# Altium PCB MolsonPCB.PcbDoc (part 2 of 9)
Units mil, origin at the board's own origin, x right, y up, seen from the top; angles counter-clockwise.
Board outline 8000 x 6000 mil, 14 copper layers (TopLayer (1 oz), InternalPlane1 (0.5 oz), InternalPlane2 (0.5 oz), MidLayer1 (0.5 oz), InternalPlane3 (0.5 oz), MidLayer2 (0.5 oz), InternalPlane4 (0.5 oz), InternalPlane5 (0.5 oz), MidLayer3 (0.5 oz), InternalPlane6 (0.5 oz), MidLayer4 (0.5 oz), InternalPlane7 (0.5 oz), InternalPlane8 (0.5 oz), BottomLayer (1 oz)), stack 86.2 mil thick; 657 components, 643 nets, 3094 pads, 1958 vias.
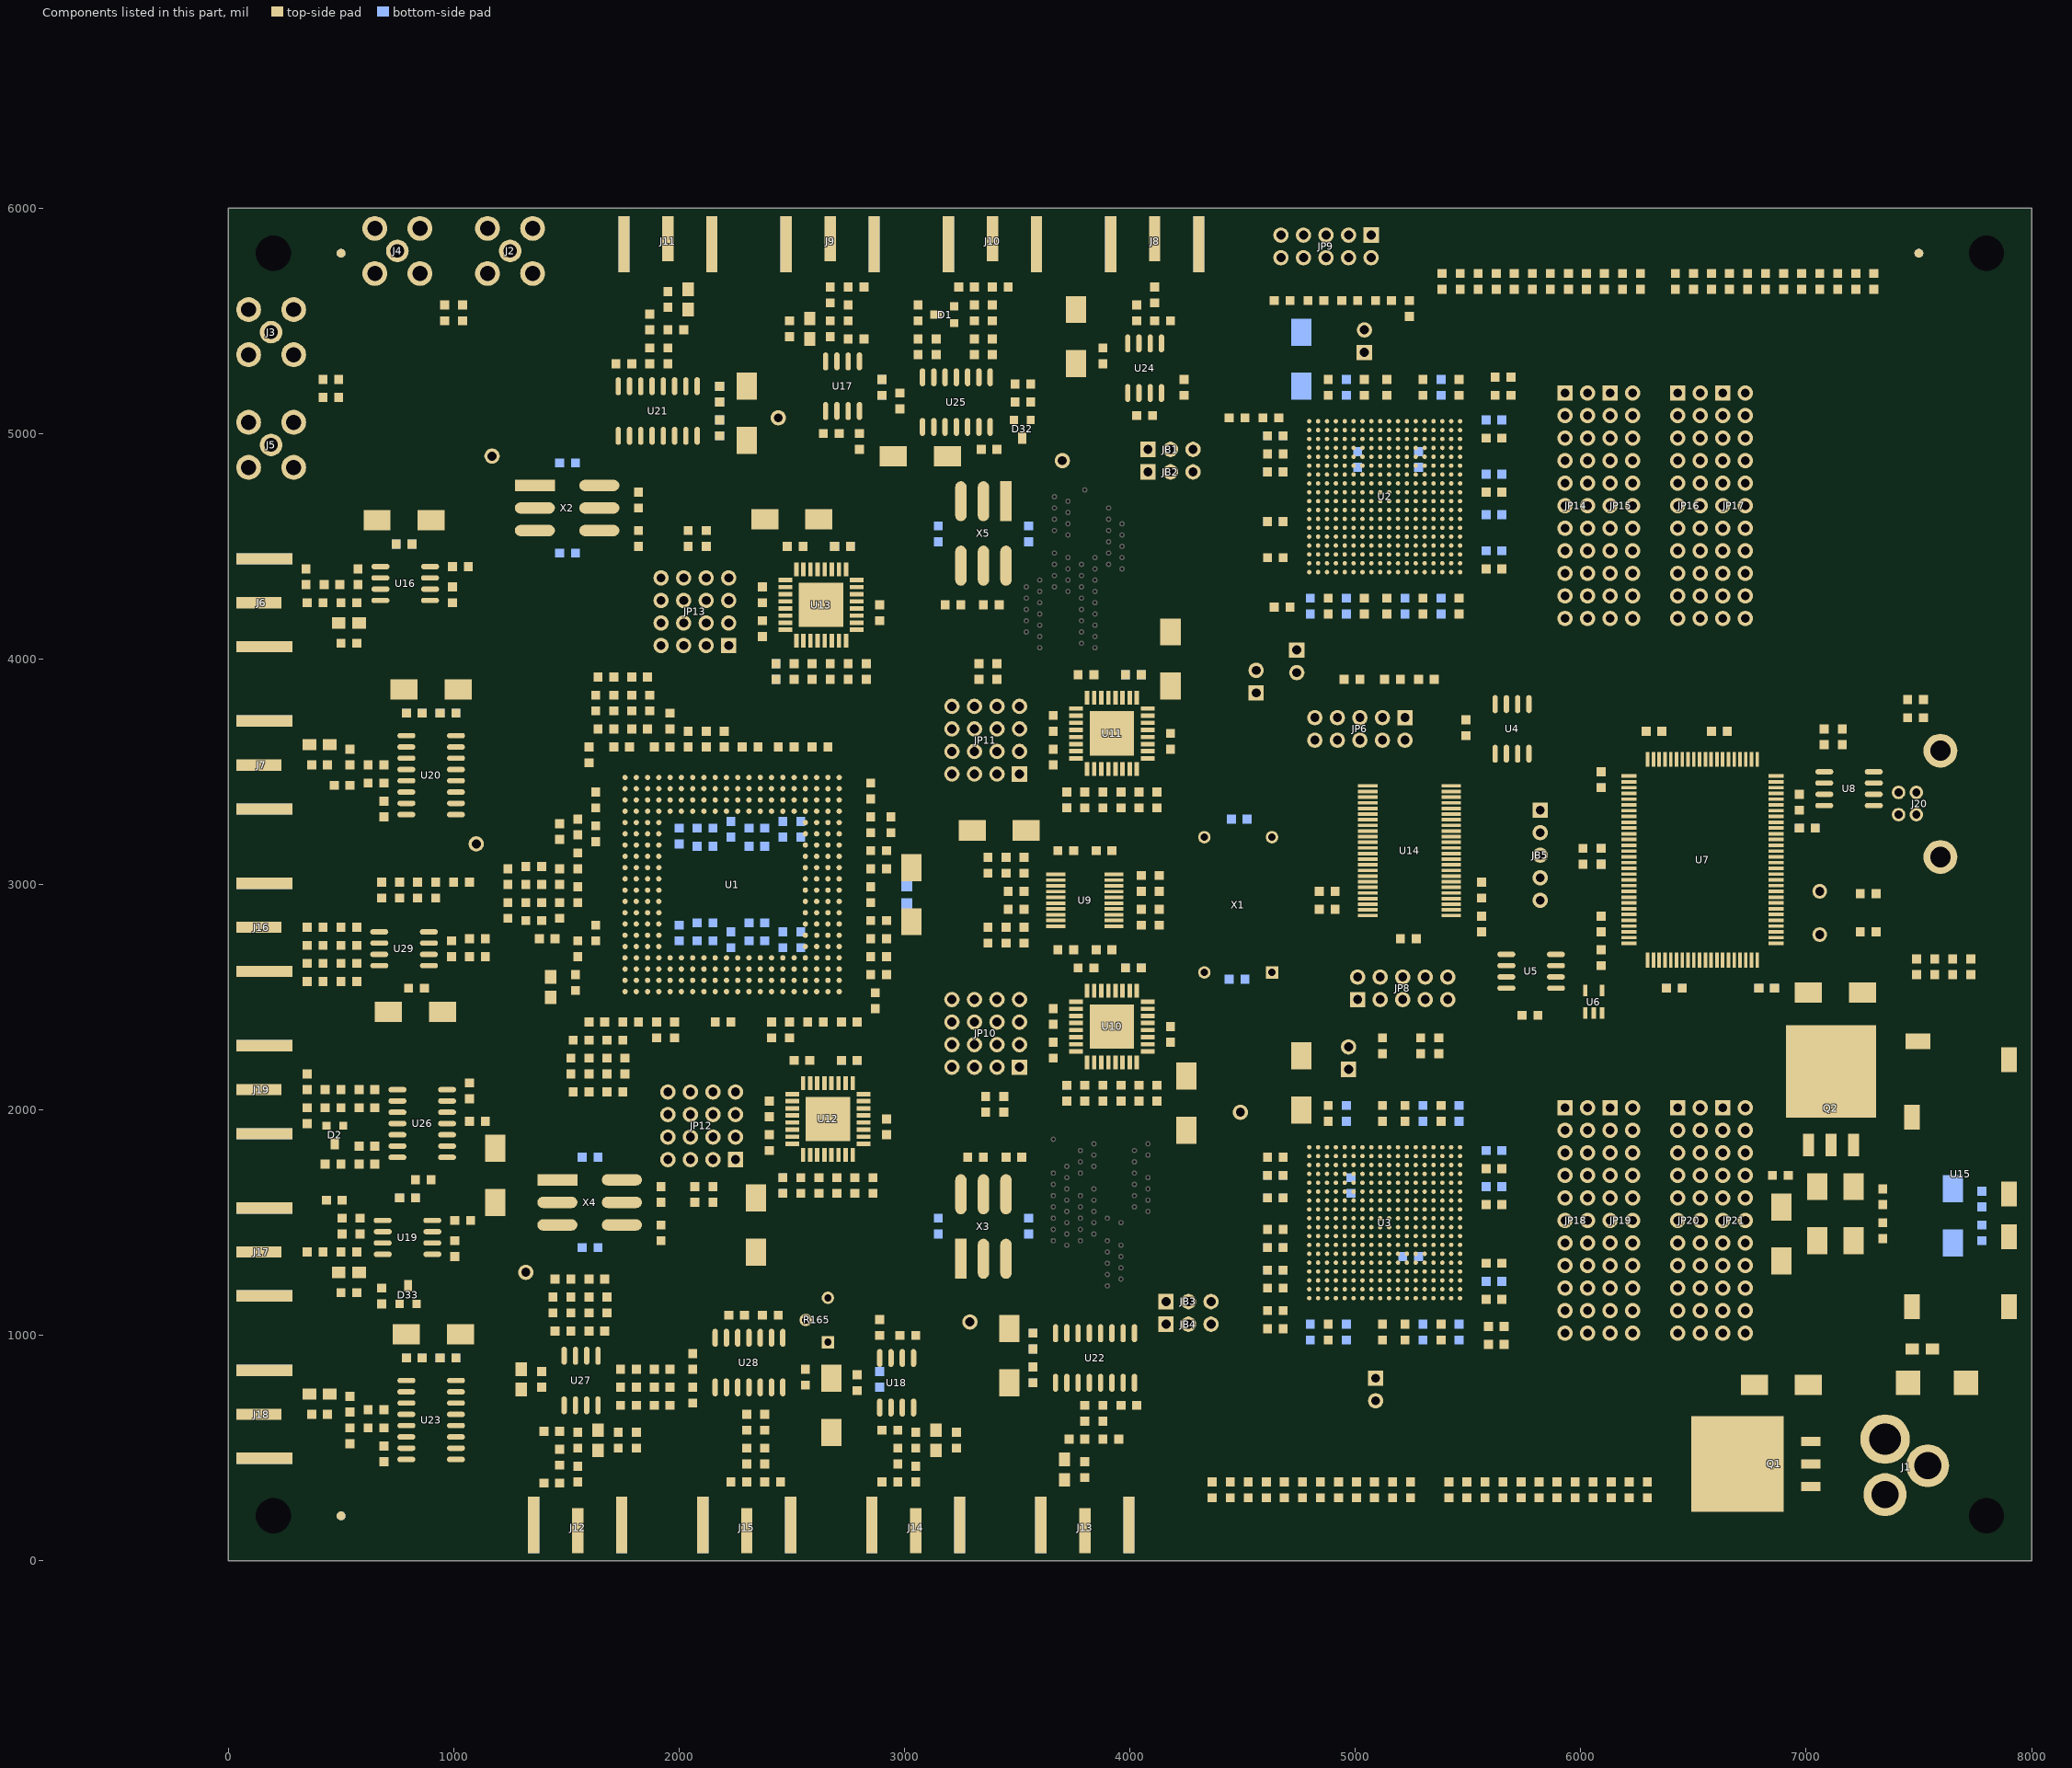
[diagram p14: the components of this part, seen from the top]

## Design rules (kind name [scope] priority, off if disabled: settings) (continued)
Width "Schematic Width Constraint_77" [InNet('NetC112_2')] p87: maxlimit=12.34 minlimit=0 preferedwidth=5.07 toplayer_minwidth=12.34 toplayer_prefwidth=12.34 midlayer1_minwidth=5.07 midlayer1_maxwidth=5.07 midlayer2_minwidth=5.07 midlayer2_maxwidth=5.07 midlayer3_minwidth=5.07 midlayer3_maxwidth=5.07 midlayer4_minwidth=5.07 midlayer4_maxwidth=5.07 bottomlayer_minwidth=12.34 bottomlayer_prefwidth=12.34 impedancedriven=TRUE minimp=50.000000 maximp=50.000000 favimp=50.000000
Width "Schematic Width Constraint_76" [InNet('NetC110_2')] p88: maxlimit=12.34 minlimit=0 preferedwidth=5.07 toplayer_minwidth=12.34 toplayer_prefwidth=12.34 midlayer1_minwidth=5.07 midlayer1_maxwidth=5.07 midlayer2_minwidth=5.07 midlayer2_maxwidth=5.07 midlayer3_minwidth=5.07 midlayer3_maxwidth=5.07 midlayer4_minwidth=5.07 midlayer4_maxwidth=5.07 bottomlayer_minwidth=12.34 bottomlayer_prefwidth=12.34 impedancedriven=TRUE minimp=50.000000 maximp=50.000000 favimp=50.000000
Width "Schematic Width Constraint_75" [InNet('NetC86_2')] p89: maxlimit=5.56 minlimit=0 preferedwidth=1.76 toplayer_minwidth=5.56 toplayer_prefwidth=5.56 midlayer1_minwidth=1.76 midlayer1_maxwidth=1.76 midlayer2_minwidth=1.76 midlayer2_maxwidth=1.76 midlayer3_minwidth=1.76 midlayer3_maxwidth=1.76 midlayer4_minwidth=1.76 midlayer4_maxwidth=1.76 bottomlayer_minwidth=5.56 bottomlayer_prefwidth=5.56 impedancedriven=TRUE minimp=75.000000 maximp=75.000000 favimp=75.000000
Width "Schematic Width Constraint_74" [InNet('NetC86_1')] p90: maxlimit=5.56 minlimit=0 preferedwidth=1.76 toplayer_minwidth=5.56 toplayer_prefwidth=5.56 midlayer1_minwidth=1.76 midlayer1_maxwidth=1.76 midlayer2_minwidth=1.76 midlayer2_maxwidth=1.76 midlayer3_minwidth=1.76 midlayer3_maxwidth=1.76 midlayer4_minwidth=1.76 midlayer4_maxwidth=1.76 bottomlayer_minwidth=5.56 bottomlayer_prefwidth=5.56 impedancedriven=TRUE minimp=75.000000 maximp=75.000000 favimp=75.000000
Width "Schematic Width Constraint_73" [InNet('NetC106_1')] p91: maxlimit=5.56 minlimit=0 preferedwidth=1.76 toplayer_minwidth=5.56 toplayer_prefwidth=5.56 midlayer1_minwidth=1.76 midlayer1_maxwidth=1.76 midlayer2_minwidth=1.76 midlayer2_maxwidth=1.76 midlayer3_minwidth=1.76 midlayer3_maxwidth=1.76 midlayer4_minwidth=1.76 midlayer4_maxwidth=1.76 bottomlayer_minwidth=5.56 bottomlayer_prefwidth=5.56 impedancedriven=TRUE minimp=75.000000 maximp=75.000000 favimp=75.000000
Width "Schematic Width Constraint_72" [InNet('IND2-')] p92: maxlimit=12.34 minlimit=0 preferedwidth=5.07 toplayer_minwidth=12.34 toplayer_prefwidth=12.34 midlayer1_minwidth=5.07 midlayer1_maxwidth=5.07 midlayer2_minwidth=5.07 midlayer2_maxwidth=5.07 midlayer3_minwidth=5.07 midlayer3_maxwidth=5.07 midlayer4_minwidth=5.07 midlayer4_maxwidth=5.07 bottomlayer_minwidth=12.34 bottomlayer_prefwidth=12.34 impedancedriven=TRUE minimp=50.000000 maximp=50.000000 favimp=50.000000
Width "Schematic Width Constraint_71" [InNet('OUTB1+')] p93: maxlimit=12.34 minlimit=0 preferedwidth=5.07 toplayer_minwidth=12.34 toplayer_prefwidth=12.34 midlayer1_minwidth=5.07 midlayer1_maxwidth=5.07 midlayer2_minwidth=5.07 midlayer2_maxwidth=5.07 midlayer3_minwidth=5.07 midlayer3_maxwidth=5.07 midlayer4_minwidth=5.07 midlayer4_maxwidth=5.07 bottomlayer_minwidth=12.34 bottomlayer_prefwidth=12.34 impedancedriven=TRUE minimp=50.000000 maximp=50.000000 favimp=50.000000
Width "Schematic Width Constraint_70" [InNet('NetR120_1')] p94: maxlimit=5.56 minlimit=0 preferedwidth=1.76 toplayer_minwidth=5.56 toplayer_prefwidth=5.56 midlayer1_minwidth=1.76 midlayer1_maxwidth=1.76 midlayer2_minwidth=1.76 midlayer2_maxwidth=1.76 midlayer3_minwidth=1.76 midlayer3_maxwidth=1.76 midlayer4_minwidth=1.76 midlayer4_maxwidth=1.76 bottomlayer_minwidth=5.56 bottomlayer_prefwidth=5.56 impedancedriven=TRUE minimp=75.000000 maximp=75.000000 favimp=75.000000
Width "Schematic Width Constraint_69" [InNet('NetC109_1')] p95: maxlimit=5.56 minlimit=0 preferedwidth=1.76 toplayer_minwidth=5.56 toplayer_prefwidth=5.56 midlayer1_minwidth=1.76 midlayer1_maxwidth=1.76 midlayer2_minwidth=1.76 midlayer2_maxwidth=1.76 midlayer3_minwidth=1.76 midlayer3_maxwidth=1.76 midlayer4_minwidth=1.76 midlayer4_maxwidth=1.76 bottomlayer_minwidth=5.56 bottomlayer_prefwidth=5.56 impedancedriven=TRUE minimp=75.000000 maximp=75.000000 favimp=75.000000
Width "Schematic Width Constraint_68" [InNet('NetC103_2')] p96: maxlimit=5.56 minlimit=0 preferedwidth=1.76 toplayer_minwidth=5.56 toplayer_prefwidth=5.56 midlayer1_minwidth=1.76 midlayer1_maxwidth=1.76 midlayer2_minwidth=1.76 midlayer2_maxwidth=1.76 midlayer3_minwidth=1.76 midlayer3_maxwidth=1.76 midlayer4_minwidth=1.76 midlayer4_maxwidth=1.76 bottomlayer_minwidth=5.56 bottomlayer_prefwidth=5.56 impedancedriven=TRUE minimp=75.000000 maximp=75.000000 favimp=75.000000
Width "Schematic Width Constraint_67" [InNet('NetC104_2')] p97: maxlimit=12.34 minlimit=0 preferedwidth=5.07 toplayer_minwidth=12.34 toplayer_prefwidth=12.34 midlayer1_minwidth=5.07 midlayer1_maxwidth=5.07 midlayer2_minwidth=5.07 midlayer2_maxwidth=5.07 midlayer3_minwidth=5.07 midlayer3_maxwidth=5.07 midlayer4_minwidth=5.07 midlayer4_maxwidth=5.07 bottomlayer_minwidth=12.34 bottomlayer_prefwidth=12.34 impedancedriven=TRUE minimp=50.000000 maximp=50.000000 favimp=50.000000
Width "Schematic Width Constraint_66" [InNet('INB2-')] p98: maxlimit=12.34 minlimit=0 preferedwidth=5.07 toplayer_minwidth=12.34 toplayer_prefwidth=12.34 midlayer1_minwidth=5.07 midlayer1_maxwidth=5.07 midlayer2_minwidth=5.07 midlayer2_maxwidth=5.07 midlayer3_minwidth=5.07 midlayer3_maxwidth=5.07 midlayer4_minwidth=5.07 midlayer4_maxwidth=5.07 bottomlayer_minwidth=12.34 bottomlayer_prefwidth=12.34 impedancedriven=TRUE minimp=50.000000 maximp=50.000000 favimp=50.000000
Width "Schematic Width Constraint_65" [InNet('OUTA2-')] p99: maxlimit=12.34 minlimit=0 preferedwidth=5.07 toplayer_minwidth=12.34 toplayer_prefwidth=12.34 midlayer1_minwidth=5.07 midlayer1_maxwidth=5.07 midlayer2_minwidth=5.07 midlayer2_maxwidth=5.07 midlayer3_minwidth=5.07 midlayer3_maxwidth=5.07 midlayer4_minwidth=5.07 midlayer4_maxwidth=5.07 bottomlayer_minwidth=12.34 bottomlayer_prefwidth=12.34 impedancedriven=TRUE minimp=50.000000 maximp=50.000000 favimp=50.000000
Width "Schematic Width Constraint_64" [InNet('OUTA1-')] p100: maxlimit=12.34 minlimit=0 preferedwidth=5.07 toplayer_minwidth=12.34 toplayer_prefwidth=12.34 midlayer1_minwidth=5.07 midlayer1_maxwidth=5.07 midlayer2_minwidth=5.07 midlayer2_maxwidth=5.07 midlayer3_minwidth=5.07 midlayer3_maxwidth=5.07 midlayer4_minwidth=5.07 midlayer4_maxwidth=5.07 bottomlayer_minwidth=12.34 bottomlayer_prefwidth=12.34 impedancedriven=TRUE minimp=50.000000 maximp=50.000000 favimp=50.000000
Width "Schematic Width Constraint_63" [InNet('OUTB1-')] p101: maxlimit=12.34 minlimit=0 preferedwidth=5.07 toplayer_minwidth=12.34 toplayer_prefwidth=12.34 midlayer1_minwidth=5.07 midlayer1_maxwidth=5.07 midlayer2_minwidth=5.07 midlayer2_maxwidth=5.07 midlayer3_minwidth=5.07 midlayer3_maxwidth=5.07 midlayer4_minwidth=5.07 midlayer4_maxwidth=5.07 bottomlayer_minwidth=12.34 bottomlayer_prefwidth=12.34 impedancedriven=TRUE minimp=50.000000 maximp=50.000000 favimp=50.000000
Width "Schematic Width Constraint_62" [InNet('NetC124_2')] p102: maxlimit=5.56 minlimit=0 preferedwidth=1.76 toplayer_minwidth=5.56 toplayer_prefwidth=5.56 midlayer1_minwidth=1.76 midlayer1_maxwidth=1.76 midlayer2_minwidth=1.76 midlayer2_maxwidth=1.76 midlayer3_minwidth=1.76 midlayer3_maxwidth=1.76 midlayer4_minwidth=1.76 midlayer4_maxwidth=1.76 bottomlayer_minwidth=5.56 bottomlayer_prefwidth=5.56 impedancedriven=TRUE minimp=75.000000 maximp=75.000000 favimp=75.000000
Width "Schematic Width Constraint_61" [InNet('NetC114_2')] p103: maxlimit=5.56 minlimit=0 preferedwidth=1.76 toplayer_minwidth=5.56 toplayer_prefwidth=5.56 midlayer1_minwidth=1.76 midlayer1_maxwidth=1.76 midlayer2_minwidth=1.76 midlayer2_maxwidth=1.76 midlayer3_minwidth=1.76 midlayer3_maxwidth=1.76 midlayer4_minwidth=1.76 midlayer4_maxwidth=1.76 bottomlayer_minwidth=5.56 bottomlayer_prefwidth=5.56 impedancedriven=TRUE minimp=75.000000 maximp=75.000000 favimp=75.000000
Width "Schematic Width Constraint_60" [InNet('NetC115_1')] p104: maxlimit=5.56 minlimit=0 preferedwidth=1.76 toplayer_minwidth=5.56 toplayer_prefwidth=5.56 midlayer1_minwidth=1.76 midlayer1_maxwidth=1.76 midlayer2_minwidth=1.76 midlayer2_maxwidth=1.76 midlayer3_minwidth=1.76 midlayer3_maxwidth=1.76 midlayer4_minwidth=1.76 midlayer4_maxwidth=1.76 bottomlayer_minwidth=5.56 bottomlayer_prefwidth=5.56 impedancedriven=TRUE minimp=75.000000 maximp=75.000000 favimp=75.000000
Width "Schematic Width Constraint_59" [InNet('NetC97_1')] p105: maxlimit=5.56 minlimit=0 preferedwidth=1.76 toplayer_minwidth=5.56 toplayer_prefwidth=5.56 midlayer1_minwidth=1.76 midlayer1_maxwidth=1.76 midlayer2_minwidth=1.76 midlayer2_maxwidth=1.76 midlayer3_minwidth=1.76 midlayer3_maxwidth=1.76 midlayer4_minwidth=1.76 midlayer4_maxwidth=1.76 bottomlayer_minwidth=5.56 bottomlayer_prefwidth=5.56 impedancedriven=TRUE minimp=75.000000 maximp=75.000000 favimp=75.000000
Width "Schematic Width Constraint_58" [InNet('NetC96_2')] p106: maxlimit=5.56 minlimit=0 preferedwidth=1.76 toplayer_minwidth=5.56 toplayer_prefwidth=5.56 midlayer1_minwidth=1.76 midlayer1_maxwidth=1.76 midlayer2_minwidth=1.76 midlayer2_maxwidth=1.76 midlayer3_minwidth=1.76 midlayer3_maxwidth=1.76 midlayer4_minwidth=1.76 midlayer4_maxwidth=1.76 bottomlayer_minwidth=5.56 bottomlayer_prefwidth=5.56 impedancedriven=TRUE minimp=75.000000 maximp=75.000000 favimp=75.000000
Width "Schematic Width Constraint_57" [InNet('NetR69_2')] p107: maxlimit=5.56 minlimit=0 preferedwidth=1.76 toplayer_minwidth=5.56 toplayer_prefwidth=5.56 midlayer1_minwidth=1.76 midlayer1_maxwidth=1.76 midlayer2_minwidth=1.76 midlayer2_maxwidth=1.76 midlayer3_minwidth=1.76 midlayer3_maxwidth=1.76 midlayer4_minwidth=1.76 midlayer4_maxwidth=1.76 bottomlayer_minwidth=5.56 bottomlayer_prefwidth=5.56 impedancedriven=TRUE minimp=75.000000 maximp=75.000000 favimp=75.000000
Width "Schematic Width Constraint_56" [InNet('NetR66_2')] p108: maxlimit=5.56 minlimit=0 preferedwidth=1.76 toplayer_minwidth=5.56 toplayer_prefwidth=5.56 midlayer1_minwidth=1.76 midlayer1_maxwidth=1.76 midlayer2_minwidth=1.76 midlayer2_maxwidth=1.76 midlayer3_minwidth=1.76 midlayer3_maxwidth=1.76 midlayer4_minwidth=1.76 midlayer4_maxwidth=1.76 bottomlayer_minwidth=5.56 bottomlayer_prefwidth=5.56 impedancedriven=TRUE minimp=75.000000 maximp=75.000000 favimp=75.000000
Width "Schematic Width Constraint_55" [InNet('INC2+')] p109: maxlimit=12.34 minlimit=0 preferedwidth=5.07 toplayer_minwidth=12.34 toplayer_prefwidth=12.34 midlayer1_minwidth=5.07 midlayer1_maxwidth=5.07 midlayer2_minwidth=5.07 midlayer2_maxwidth=5.07 midlayer3_minwidth=5.07 midlayer3_maxwidth=5.07 midlayer4_minwidth=5.07 midlayer4_maxwidth=5.07 bottomlayer_minwidth=12.34 bottomlayer_prefwidth=12.34 impedancedriven=TRUE minimp=50.000000 maximp=50.000000 favimp=50.000000
Width "Schematic Width Constraint_54" [InNet('OUTD2+')] p110: maxlimit=12.34 minlimit=0 preferedwidth=5.07 toplayer_minwidth=12.34 toplayer_prefwidth=12.34 midlayer1_minwidth=5.07 midlayer1_maxwidth=5.07 midlayer2_minwidth=5.07 midlayer2_maxwidth=5.07 midlayer3_minwidth=5.07 midlayer3_maxwidth=5.07 midlayer4_minwidth=5.07 midlayer4_maxwidth=5.07 bottomlayer_minwidth=12.34 bottomlayer_prefwidth=12.34 impedancedriven=TRUE minimp=50.000000 maximp=50.000000 favimp=50.000000
Width "Schematic Width Constraint_53" [InNet('REFCLKA+')] p111: maxlimit=12.34 minlimit=0 preferedwidth=5.07 toplayer_minwidth=12.34 toplayer_prefwidth=12.34 midlayer1_minwidth=5.07 midlayer1_maxwidth=5.07 midlayer2_minwidth=5.07 midlayer2_maxwidth=5.07 midlayer3_minwidth=5.07 midlayer3_maxwidth=5.07 midlayer4_minwidth=5.07 midlayer4_maxwidth=5.07 bottomlayer_minwidth=12.34 bottomlayer_prefwidth=12.34 impedancedriven=TRUE minimp=50.000000 maximp=50.000000 favimp=50.000000
Width "Schematic Width Constraint_52" [InNet('NetR35_2')] p112: maxlimit=12.34 minlimit=0 preferedwidth=5.07 toplayer_minwidth=3.18 toplayer_prefwidth=12.34 midlayer1_minwidth=0.75 midlayer1_maxwidth=5.07 midlayer2_minwidth=0.75 midlayer2_maxwidth=5.07 midlayer3_minwidth=0.75 midlayer3_maxwidth=5.07 midlayer4_minwidth=0.75 midlayer4_maxwidth=5.07 bottomlayer_minwidth=3.18 bottomlayer_prefwidth=12.34 impedancedriven=TRUE minimp=50.000000 maximp=90.000000 favimp=50.000000
Width "Schematic Width Constraint_51" [InNet('NetR38_1')] p113: maxlimit=12.34 minlimit=0 preferedwidth=5.07 toplayer_minwidth=3.18 toplayer_prefwidth=12.34 midlayer1_minwidth=0.75 midlayer1_maxwidth=5.07 midlayer2_minwidth=0.75 midlayer2_maxwidth=5.07 midlayer3_minwidth=0.75 midlayer3_maxwidth=5.07 midlayer4_minwidth=0.75 midlayer4_maxwidth=5.07 bottomlayer_minwidth=3.18 bottomlayer_prefwidth=12.34 impedancedriven=TRUE minimp=50.000000 maximp=90.000000 favimp=50.000000
Width "Schematic Width Constraint_50" [InNet('NetJ16_S')] p114: maxlimit=5.56 minlimit=0 preferedwidth=1.76 toplayer_minwidth=5.56 toplayer_prefwidth=5.56 midlayer1_minwidth=1.76 midlayer1_maxwidth=1.76 midlayer2_minwidth=1.76 midlayer2_maxwidth=1.76 midlayer3_minwidth=1.76 midlayer3_maxwidth=1.76 midlayer4_minwidth=1.76 midlayer4_maxwidth=1.76 bottomlayer_minwidth=5.56 bottomlayer_prefwidth=5.56 impedancedriven=TRUE minimp=75.000000 maximp=75.000000 favimp=75.000000
Width "Schematic Width Constraint_49" [InNet('NetC124_1')] p115: maxlimit=5.56 minlimit=0 preferedwidth=1.76 toplayer_minwidth=5.56 toplayer_prefwidth=5.56 midlayer1_minwidth=1.76 midlayer1_maxwidth=1.76 midlayer2_minwidth=1.76 midlayer2_maxwidth=1.76 midlayer3_minwidth=1.76 midlayer3_maxwidth=1.76 midlayer4_minwidth=1.76 midlayer4_maxwidth=1.76 bottomlayer_minwidth=5.56 bottomlayer_prefwidth=5.56 impedancedriven=TRUE minimp=75.000000 maximp=75.000000 favimp=75.000000
Width "Schematic Width Constraint_48" [InNet('NetC121_2')] p116: maxlimit=5.56 minlimit=0 preferedwidth=1.76 toplayer_minwidth=5.56 toplayer_prefwidth=5.56 midlayer1_minwidth=1.76 midlayer1_maxwidth=1.76 midlayer2_minwidth=1.76 midlayer2_maxwidth=1.76 midlayer3_minwidth=1.76 midlayer3_maxwidth=1.76 midlayer4_minwidth=1.76 midlayer4_maxwidth=1.76 bottomlayer_minwidth=5.56 bottomlayer_prefwidth=5.56 impedancedriven=TRUE minimp=75.000000 maximp=75.000000 favimp=75.000000
Width "Schematic Width Constraint_47" [InNet('REFCLKB+')] p117: maxlimit=12.34 minlimit=0 preferedwidth=5.07 toplayer_minwidth=2.05 toplayer_prefwidth=12.34 midlayer1_minwidth=0.3 midlayer1_maxwidth=5.07 midlayer2_minwidth=0.3 midlayer2_maxwidth=5.07 midlayer3_minwidth=0.3 midlayer3_maxwidth=5.07 midlayer4_minwidth=0.3 midlayer4_maxwidth=5.07 bottomlayer_minwidth=2.05 bottomlayer_prefwidth=12.34 impedancedriven=TRUE minimp=50.000000 maximp=100.000000 favimp=50.000000
Width "Schematic Width Constraint_46" [InNet('NetR88_1')] p118: maxlimit=5.56 minlimit=0 preferedwidth=1.76 toplayer_minwidth=5.56 toplayer_prefwidth=5.56 midlayer1_minwidth=1.76 midlayer1_maxwidth=1.76 midlayer2_minwidth=1.76 midlayer2_maxwidth=1.76 midlayer3_minwidth=1.76 midlayer3_maxwidth=1.76 midlayer4_minwidth=1.76 midlayer4_maxwidth=1.76 bottomlayer_minwidth=5.56 bottomlayer_prefwidth=5.56 impedancedriven=TRUE minimp=75.000000 maximp=75.000000 favimp=75.000000
Width "Schematic Width Constraint_45" [InNet('NetL3_1')] p119: maxlimit=5.56 minlimit=0 preferedwidth=1.76 toplayer_minwidth=5.56 toplayer_prefwidth=5.56 midlayer1_minwidth=1.76 midlayer1_maxwidth=1.76 midlayer2_minwidth=1.76 midlayer2_maxwidth=1.76 midlayer3_minwidth=1.76 midlayer3_maxwidth=1.76 midlayer4_minwidth=1.76 midlayer4_maxwidth=1.76 bottomlayer_minwidth=5.56 bottomlayer_prefwidth=5.56 impedancedriven=TRUE minimp=75.000000 maximp=75.000000 favimp=75.000000
Width "Schematic Width Constraint_44" [InNet('NetC96_1')] p120: maxlimit=5.56 minlimit=0 preferedwidth=1.76 toplayer_minwidth=5.56 toplayer_prefwidth=5.56 midlayer1_minwidth=1.76 midlayer1_maxwidth=1.76 midlayer2_minwidth=1.76 midlayer2_maxwidth=1.76 midlayer3_minwidth=1.76 midlayer3_maxwidth=1.76 midlayer4_minwidth=1.76 midlayer4_maxwidth=1.76 bottomlayer_minwidth=5.56 bottomlayer_prefwidth=5.56 impedancedriven=TRUE minimp=75.000000 maximp=75.000000 favimp=75.000000
Width "Schematic Width Constraint_43" [InNet('NetC115_2')] p121: maxlimit=5.56 minlimit=0 preferedwidth=1.76 toplayer_minwidth=5.56 toplayer_prefwidth=5.56 midlayer1_minwidth=1.76 midlayer1_maxwidth=1.76 midlayer2_minwidth=1.76 midlayer2_maxwidth=1.76 midlayer3_minwidth=1.76 midlayer3_maxwidth=1.76 midlayer4_minwidth=1.76 midlayer4_maxwidth=1.76 bottomlayer_minwidth=5.56 bottomlayer_prefwidth=5.56 impedancedriven=TRUE minimp=75.000000 maximp=75.000000 favimp=75.000000
Width "Schematic Width Constraint_42" [InNet('NetC117_2')] p122: maxlimit=5.56 minlimit=0 preferedwidth=1.76 toplayer_minwidth=5.56 toplayer_prefwidth=5.56 midlayer1_minwidth=1.76 midlayer1_maxwidth=1.76 midlayer2_minwidth=1.76 midlayer2_maxwidth=1.76 midlayer3_minwidth=1.76 midlayer3_maxwidth=1.76 midlayer4_minwidth=1.76 midlayer4_maxwidth=1.76 bottomlayer_minwidth=5.56 bottomlayer_prefwidth=5.56 impedancedriven=TRUE minimp=75.000000 maximp=75.000000 favimp=75.000000
Width "Schematic Width Constraint_41" [InNet('NetC78_1')] p123: maxlimit=5.56 minlimit=0 preferedwidth=1.76 toplayer_minwidth=5.56 toplayer_prefwidth=5.56 midlayer1_minwidth=1.76 midlayer1_maxwidth=1.76 midlayer2_minwidth=1.76 midlayer2_maxwidth=1.76 midlayer3_minwidth=1.76 midlayer3_maxwidth=1.76 midlayer4_minwidth=1.76 midlayer4_maxwidth=1.76 bottomlayer_minwidth=5.56 bottomlayer_prefwidth=5.56 impedancedriven=TRUE minimp=75.000000 maximp=75.000000 favimp=75.000000
Width "Schematic Width Constraint_40" [InNet('NetC117_1')] p124: maxlimit=5.56 minlimit=0 preferedwidth=1.76 toplayer_minwidth=5.56 toplayer_prefwidth=5.56 midlayer1_minwidth=1.76 midlayer1_maxwidth=1.76 midlayer2_minwidth=1.76 midlayer2_maxwidth=1.76 midlayer3_minwidth=1.76 midlayer3_maxwidth=1.76 midlayer4_minwidth=1.76 midlayer4_maxwidth=1.76 bottomlayer_minwidth=5.56 bottomlayer_prefwidth=5.56 impedancedriven=TRUE minimp=75.000000 maximp=75.000000 favimp=75.000000
Width "Schematic Width Constraint_39" [InNet('NetC82_2')] p125: maxlimit=5.56 minlimit=0 preferedwidth=1.76 toplayer_minwidth=5.56 toplayer_prefwidth=5.56 midlayer1_minwidth=1.76 midlayer1_maxwidth=1.76 midlayer2_minwidth=1.76 midlayer2_maxwidth=1.76 midlayer3_minwidth=1.76 midlayer3_maxwidth=1.76 midlayer4_minwidth=1.76 midlayer4_maxwidth=1.76 bottomlayer_minwidth=5.56 bottomlayer_prefwidth=5.56 impedancedriven=TRUE minimp=75.000000 maximp=75.000000 favimp=75.000000
Width "Schematic Width Constraint_38" [InNet('NetR77_2')] p126: maxlimit=5.56 minlimit=0 preferedwidth=1.76 toplayer_minwidth=5.56 toplayer_prefwidth=5.56 midlayer1_minwidth=1.76 midlayer1_maxwidth=1.76 midlayer2_minwidth=1.76 midlayer2_maxwidth=1.76 midlayer3_minwidth=1.76 midlayer3_maxwidth=1.76 midlayer4_minwidth=1.76 midlayer4_maxwidth=1.76 bottomlayer_minwidth=5.56 bottomlayer_prefwidth=5.56 impedancedriven=TRUE minimp=75.000000 maximp=75.000000 favimp=75.000000
Width "Schematic Width Constraint_37" [InNet('NetR78_2')] p127: maxlimit=5.56 minlimit=0 preferedwidth=1.76 toplayer_minwidth=5.56 toplayer_prefwidth=5.56 midlayer1_minwidth=1.76 midlayer1_maxwidth=1.76 midlayer2_minwidth=1.76 midlayer2_maxwidth=1.76 midlayer3_minwidth=1.76 midlayer3_maxwidth=1.76 midlayer4_minwidth=1.76 midlayer4_maxwidth=1.76 bottomlayer_minwidth=5.56 bottomlayer_prefwidth=5.56 impedancedriven=TRUE minimp=75.000000 maximp=75.000000 favimp=75.000000
Width "Schematic Width Constraint_36" [InNet('NetJP10_3')] p128: maxlimit=12.34 minlimit=0 preferedwidth=5.07 toplayer_minwidth=2.05 toplayer_prefwidth=12.34 midlayer1_minwidth=0.3 midlayer1_maxwidth=5.07 midlayer2_minwidth=0.3 midlayer2_maxwidth=5.07 midlayer3_minwidth=0.3 midlayer3_maxwidth=5.07 midlayer4_minwidth=0.3 midlayer4_maxwidth=5.07 bottomlayer_minwidth=2.05 bottomlayer_prefwidth=12.34 impedancedriven=TRUE minimp=50.000000 maximp=100.000000 favimp=50.000000
Width "Schematic Width Constraint_35" [InNet('NetR109_1')] p129: maxlimit=5.56 minlimit=0 preferedwidth=1.76 toplayer_minwidth=5.56 toplayer_prefwidth=5.56 midlayer1_minwidth=1.76 midlayer1_maxwidth=1.76 midlayer2_minwidth=1.76 midlayer2_maxwidth=1.76 midlayer3_minwidth=1.76 midlayer3_maxwidth=1.76 midlayer4_minwidth=1.76 midlayer4_maxwidth=1.76 bottomlayer_minwidth=5.56 bottomlayer_prefwidth=5.56 impedancedriven=TRUE minimp=75.000000 maximp=75.000000 favimp=75.000000
Width "Schematic Width Constraint_34" [InNet('NetC105_1')] p130: maxlimit=5.56 minlimit=0 preferedwidth=1.76 toplayer_minwidth=5.56 toplayer_prefwidth=5.56 midlayer1_minwidth=1.76 midlayer1_maxwidth=1.76 midlayer2_minwidth=1.76 midlayer2_maxwidth=1.76 midlayer3_minwidth=1.76 midlayer3_maxwidth=1.76 midlayer4_minwidth=1.76 midlayer4_maxwidth=1.76 bottomlayer_minwidth=5.56 bottomlayer_prefwidth=5.56 impedancedriven=TRUE minimp=75.000000 maximp=75.000000 favimp=75.000000
Width "Schematic Width Constraint_33" [InNet('OUTA1+')] p131: maxlimit=12.34 minlimit=0 preferedwidth=5.07 toplayer_minwidth=12.34 toplayer_prefwidth=12.34 midlayer1_minwidth=5.07 midlayer1_maxwidth=5.07 midlayer2_minwidth=5.07 midlayer2_maxwidth=5.07 midlayer3_minwidth=5.07 midlayer3_maxwidth=5.07 midlayer4_minwidth=5.07 midlayer4_maxwidth=5.07 bottomlayer_minwidth=12.34 bottomlayer_prefwidth=12.34 impedancedriven=TRUE minimp=50.000000 maximp=50.000000 favimp=50.000000
Width "Schematic Width Constraint_32" [InNet('OUTA2+')] p132: maxlimit=12.34 minlimit=0 preferedwidth=5.07 toplayer_minwidth=12.34 toplayer_prefwidth=12.34 midlayer1_minwidth=5.07 midlayer1_maxwidth=5.07 midlayer2_minwidth=5.07 midlayer2_maxwidth=5.07 midlayer3_minwidth=5.07 midlayer3_maxwidth=5.07 midlayer4_minwidth=5.07 midlayer4_maxwidth=5.07 bottomlayer_minwidth=12.34 bottomlayer_prefwidth=12.34 impedancedriven=TRUE minimp=50.000000 maximp=50.000000 favimp=50.000000
Width "Schematic Width Constraint_31" [InNet('INB2+')] p133: maxlimit=12.34 minlimit=0 preferedwidth=5.07 toplayer_minwidth=12.34 toplayer_prefwidth=12.34 midlayer1_minwidth=5.07 midlayer1_maxwidth=5.07 midlayer2_minwidth=5.07 midlayer2_maxwidth=5.07 midlayer3_minwidth=5.07 midlayer3_maxwidth=5.07 midlayer4_minwidth=5.07 midlayer4_maxwidth=5.07 bottomlayer_minwidth=12.34 bottomlayer_prefwidth=12.34 impedancedriven=TRUE minimp=50.000000 maximp=50.000000 favimp=50.000000
Width "Schematic Width Constraint_30" [InNet('NetC97_2')] p134: maxlimit=5.56 minlimit=0 preferedwidth=1.76 toplayer_minwidth=5.56 toplayer_prefwidth=5.56 midlayer1_minwidth=1.76 midlayer1_maxwidth=1.76 midlayer2_minwidth=1.76 midlayer2_maxwidth=1.76 midlayer3_minwidth=1.76 midlayer3_maxwidth=1.76 midlayer4_minwidth=1.76 midlayer4_maxwidth=1.76 bottomlayer_minwidth=5.56 bottomlayer_prefwidth=5.56 impedancedriven=TRUE minimp=75.000000 maximp=75.000000 favimp=75.000000
Width "Schematic Width Constraint_29" [InNet('NetC98_1')] p135: maxlimit=5.56 minlimit=0 preferedwidth=1.76 toplayer_minwidth=5.56 toplayer_prefwidth=5.56 midlayer1_minwidth=1.76 midlayer1_maxwidth=1.76 midlayer2_minwidth=1.76 midlayer2_maxwidth=1.76 midlayer3_minwidth=1.76 midlayer3_maxwidth=1.76 midlayer4_minwidth=1.76 midlayer4_maxwidth=1.76 bottomlayer_minwidth=5.56 bottomlayer_prefwidth=5.56 impedancedriven=TRUE minimp=75.000000 maximp=75.000000 favimp=75.000000
Width "Schematic Width Constraint_28" [InNet('NetC98_2')] p136: maxlimit=5.56 minlimit=0 preferedwidth=1.76 toplayer_minwidth=5.56 toplayer_prefwidth=5.56 midlayer1_minwidth=1.76 midlayer1_maxwidth=1.76 midlayer2_minwidth=1.76 midlayer2_maxwidth=1.76 midlayer3_minwidth=1.76 midlayer3_maxwidth=1.76 midlayer4_minwidth=1.76 midlayer4_maxwidth=1.76 bottomlayer_minwidth=5.56 bottomlayer_prefwidth=5.56 impedancedriven=TRUE minimp=75.000000 maximp=75.000000 favimp=75.000000
Width "Schematic Width Constraint_27" [InNet('INB1+')] p137: maxlimit=12.34 minlimit=0 preferedwidth=5.07 toplayer_minwidth=12.34 toplayer_prefwidth=12.34 midlayer1_minwidth=5.07 midlayer1_maxwidth=5.07 midlayer2_minwidth=5.07 midlayer2_maxwidth=5.07 midlayer3_minwidth=5.07 midlayer3_maxwidth=5.07 midlayer4_minwidth=5.07 midlayer4_maxwidth=5.07 bottomlayer_minwidth=12.34 bottomlayer_prefwidth=12.34 impedancedriven=TRUE minimp=50.000000 maximp=50.000000 favimp=50.000000
Width "Schematic Width Constraint_26" [InNet('NetC69_1')] p138: maxlimit=5.56 minlimit=0 preferedwidth=1.76 toplayer_minwidth=5.56 toplayer_prefwidth=5.56 midlayer1_minwidth=1.76 midlayer1_maxwidth=1.76 midlayer2_minwidth=1.76 midlayer2_maxwidth=1.76 midlayer3_minwidth=1.76 midlayer3_maxwidth=1.76 midlayer4_minwidth=1.76 midlayer4_maxwidth=1.76 bottomlayer_minwidth=5.56 bottomlayer_prefwidth=5.56 impedancedriven=TRUE minimp=75.000000 maximp=75.000000 favimp=75.000000
Width "Schematic Width Constraint_25" [InNet('IND1-')] p139: maxlimit=12.34 minlimit=0 preferedwidth=5.07 toplayer_minwidth=12.34 toplayer_prefwidth=12.34 midlayer1_minwidth=5.07 midlayer1_maxwidth=5.07 midlayer2_minwidth=5.07 midlayer2_maxwidth=5.07 midlayer3_minwidth=5.07 midlayer3_maxwidth=5.07 midlayer4_minwidth=5.07 midlayer4_maxwidth=5.07 bottomlayer_minwidth=12.34 bottomlayer_prefwidth=12.34 impedancedriven=TRUE minimp=50.000000 maximp=50.000000 favimp=50.000000
Width "Schematic Width Constraint_24" [InNet('NetJ18_S')] p140: maxlimit=5.56 minlimit=0 preferedwidth=1.76 toplayer_minwidth=5.56 toplayer_prefwidth=5.56 midlayer1_minwidth=1.76 midlayer1_maxwidth=1.76 midlayer2_minwidth=1.76 midlayer2_maxwidth=1.76 midlayer3_minwidth=1.76 midlayer3_maxwidth=1.76 midlayer4_minwidth=1.76 midlayer4_maxwidth=1.76 bottomlayer_minwidth=5.56 bottomlayer_prefwidth=5.56 impedancedriven=TRUE minimp=75.000000 maximp=75.000000 favimp=75.000000
Width "Schematic Width Constraint_23" [InNet('REFCLKC+')] p141: maxlimit=12.34 minlimit=0 preferedwidth=5.07 toplayer_minwidth=12.34 toplayer_prefwidth=12.34 midlayer1_minwidth=5.07 midlayer1_maxwidth=5.07 midlayer2_minwidth=5.07 midlayer2_maxwidth=5.07 midlayer3_minwidth=5.07 midlayer3_maxwidth=5.07 midlayer4_minwidth=5.07 midlayer4_maxwidth=5.07 bottomlayer_minwidth=12.34 bottomlayer_prefwidth=12.34 impedancedriven=TRUE minimp=50.000000 maximp=50.000000 favimp=50.000000
Width "Schematic Width Constraint_22" [InNet('OUTC1+')] p142: maxlimit=12.34 minlimit=0 preferedwidth=5.07 toplayer_minwidth=12.34 toplayer_prefwidth=12.34 midlayer1_minwidth=5.07 midlayer1_maxwidth=5.07 midlayer2_minwidth=5.07 midlayer2_maxwidth=5.07 midlayer3_minwidth=5.07 midlayer3_maxwidth=5.07 midlayer4_minwidth=5.07 midlayer4_maxwidth=5.07 bottomlayer_minwidth=12.34 bottomlayer_prefwidth=12.34 impedancedriven=TRUE minimp=50.000000 maximp=50.000000 favimp=50.000000
Width "Schematic Width Constraint_21" [InNet('OUTB2+')] p143: maxlimit=12.34 minlimit=0 preferedwidth=5.07 toplayer_minwidth=12.34 toplayer_prefwidth=12.34 midlayer1_minwidth=5.07 midlayer1_maxwidth=5.07 midlayer2_minwidth=5.07 midlayer2_maxwidth=5.07 midlayer3_minwidth=5.07 midlayer3_maxwidth=5.07 midlayer4_minwidth=5.07 midlayer4_maxwidth=5.07 bottomlayer_minwidth=12.34 bottomlayer_prefwidth=12.34 impedancedriven=TRUE minimp=50.000000 maximp=50.000000 favimp=50.000000
Width "Schematic Width Constraint_20" [InNet('NetC93_1')] p144: maxlimit=5.56 minlimit=0 preferedwidth=1.76 toplayer_minwidth=5.56 toplayer_prefwidth=5.56 midlayer1_minwidth=1.76 midlayer1_maxwidth=1.76 midlayer2_minwidth=1.76 midlayer2_maxwidth=1.76 midlayer3_minwidth=1.76 midlayer3_maxwidth=1.76 midlayer4_minwidth=1.76 midlayer4_maxwidth=1.76 bottomlayer_minwidth=5.56 bottomlayer_prefwidth=5.56 impedancedriven=TRUE minimp=75.000000 maximp=75.000000 favimp=75.000000
Width "Schematic Width Constraint_19" [InNet('NetJ15_S')] p145: maxlimit=5.56 minlimit=0 preferedwidth=1.76 toplayer_minwidth=5.56 toplayer_prefwidth=5.56 midlayer1_minwidth=1.76 midlayer1_maxwidth=1.76 midlayer2_minwidth=1.76 midlayer2_maxwidth=1.76 midlayer3_minwidth=1.76 midlayer3_maxwidth=1.76 midlayer4_minwidth=1.76 midlayer4_maxwidth=1.76 bottomlayer_minwidth=5.56 bottomlayer_prefwidth=5.56 impedancedriven=TRUE minimp=75.000000 maximp=75.000000 favimp=75.000000
Width "Schematic Width Constraint_18" [InNet('NetL9_1')] p146: maxlimit=5.56 minlimit=0 preferedwidth=1.76 toplayer_minwidth=5.56 toplayer_prefwidth=5.56 midlayer1_minwidth=1.76 midlayer1_maxwidth=1.76 midlayer2_minwidth=1.76 midlayer2_maxwidth=1.76 midlayer3_minwidth=1.76 midlayer3_maxwidth=1.76 midlayer4_minwidth=1.76 midlayer4_maxwidth=1.76 bottomlayer_minwidth=5.56 bottomlayer_prefwidth=5.56 impedancedriven=TRUE minimp=75.000000 maximp=75.000000 favimp=75.000000
Width "Schematic Width Constraint_17" [InNet('NetL4_1')] p147: maxlimit=5.56 minlimit=0 preferedwidth=1.76 toplayer_minwidth=5.56 toplayer_prefwidth=5.56 midlayer1_minwidth=1.76 midlayer1_maxwidth=1.76 midlayer2_minwidth=1.76 midlayer2_maxwidth=1.76 midlayer3_minwidth=1.76 midlayer3_maxwidth=1.76 midlayer4_minwidth=1.76 midlayer4_maxwidth=1.76 bottomlayer_minwidth=5.56 bottomlayer_prefwidth=5.56 impedancedriven=TRUE minimp=75.000000 maximp=75.000000 favimp=75.000000
Width "Schematic Width Constraint_16" [InNet('NetR80_1')] p148: maxlimit=5.56 minlimit=0 preferedwidth=1.76 toplayer_minwidth=5.56 toplayer_prefwidth=5.56 midlayer1_minwidth=1.76 midlayer1_maxwidth=1.76 midlayer2_minwidth=1.76 midlayer2_maxwidth=1.76 midlayer3_minwidth=1.76 midlayer3_maxwidth=1.76 midlayer4_minwidth=1.76 midlayer4_maxwidth=1.76 bottomlayer_minwidth=5.56 bottomlayer_prefwidth=5.56 impedancedriven=TRUE minimp=75.000000 maximp=75.000000 favimp=75.000000
Width "Schematic Width Constraint_15" [InNet('INC2-')] p149: maxlimit=12.34 minlimit=0 preferedwidth=5.07 toplayer_minwidth=12.34 toplayer_prefwidth=12.34 midlayer1_minwidth=5.07 midlayer1_maxwidth=5.07 midlayer2_minwidth=5.07 midlayer2_maxwidth=5.07 midlayer3_minwidth=5.07 midlayer3_maxwidth=5.07 midlayer4_minwidth=5.07 midlayer4_maxwidth=5.07 bottomlayer_minwidth=12.34 bottomlayer_prefwidth=12.34 impedancedriven=TRUE minimp=50.000000 maximp=50.000000 favimp=50.000000
Width "Schematic Width Constraint_14" [InNet('IND1+')] p150: maxlimit=12.34 minlimit=0 preferedwidth=5.07 toplayer_minwidth=12.34 toplayer_prefwidth=12.34 midlayer1_minwidth=5.07 midlayer1_maxwidth=5.07 midlayer2_minwidth=5.07 midlayer2_maxwidth=5.07 midlayer3_minwidth=5.07 midlayer3_maxwidth=5.07 midlayer4_minwidth=5.07 midlayer4_maxwidth=5.07 bottomlayer_minwidth=12.34 bottomlayer_prefwidth=12.34 impedancedriven=TRUE minimp=50.000000 maximp=50.000000 favimp=50.000000
Width "Schematic Width Constraint_13" [InNet('INB1-')] p151: maxlimit=12.34 minlimit=0 preferedwidth=5.07 toplayer_minwidth=12.34 toplayer_prefwidth=12.34 midlayer1_minwidth=5.07 midlayer1_maxwidth=5.07 midlayer2_minwidth=5.07 midlayer2_maxwidth=5.07 midlayer3_minwidth=5.07 midlayer3_maxwidth=5.07 midlayer4_minwidth=5.07 midlayer4_maxwidth=5.07 bottomlayer_minwidth=12.34 bottomlayer_prefwidth=12.34 impedancedriven=TRUE minimp=50.000000 maximp=50.000000 favimp=50.000000
Width "Schematic Width Constraint_12" [InNet('NetR34_2')] p152: maxlimit=12.34 minlimit=0 preferedwidth=5.07 toplayer_minwidth=3.18 toplayer_prefwidth=12.34 midlayer1_minwidth=0.75 midlayer1_maxwidth=5.07 midlayer2_minwidth=0.75 midlayer2_maxwidth=5.07 midlayer3_minwidth=0.75 midlayer3_maxwidth=5.07 midlayer4_minwidth=0.75 midlayer4_maxwidth=5.07 bottomlayer_minwidth=3.18 bottomlayer_prefwidth=12.34 impedancedriven=TRUE minimp=50.000000 maximp=90.000000 favimp=50.000000
Width "Schematic Width Constraint_11" [InNet('NetR31_2')] p153: maxlimit=12.34 minlimit=0 preferedwidth=5.07 toplayer_minwidth=3.18 toplayer_prefwidth=12.34 midlayer1_minwidth=0.75 midlayer1_maxwidth=5.07 midlayer2_minwidth=0.75 midlayer2_maxwidth=5.07 midlayer3_minwidth=0.75 midlayer3_maxwidth=5.07 midlayer4_minwidth=0.75 midlayer4_maxwidth=5.07 bottomlayer_minwidth=3.18 bottomlayer_prefwidth=12.34 impedancedriven=TRUE minimp=50.000000 maximp=90.000000 favimp=50.000000
Width "Schematic Width Constraint_10" [InNet('OUTB2-')] p154: maxlimit=12.34 minlimit=0 preferedwidth=5.07 toplayer_minwidth=12.34 toplayer_prefwidth=12.34 midlayer1_minwidth=5.07 midlayer1_maxwidth=5.07 midlayer2_minwidth=5.07 midlayer2_maxwidth=5.07 midlayer3_minwidth=5.07 midlayer3_maxwidth=5.07 midlayer4_minwidth=5.07 midlayer4_maxwidth=5.07 bottomlayer_minwidth=12.34 bottomlayer_prefwidth=12.34 impedancedriven=TRUE minimp=50.000000 maximp=50.000000 favimp=50.000000
Width "Schematic Width Constraint_9" [InNet('NetC114_1')] p155: maxlimit=5.56 minlimit=0 preferedwidth=1.76 toplayer_minwidth=5.56 toplayer_prefwidth=5.56 midlayer1_minwidth=1.76 midlayer1_maxwidth=1.76 midlayer2_minwidth=1.76 midlayer2_maxwidth=1.76 midlayer3_minwidth=1.76 midlayer3_maxwidth=1.76 midlayer4_minwidth=1.76 midlayer4_maxwidth=1.76 bottomlayer_minwidth=5.56 bottomlayer_prefwidth=5.56 impedancedriven=TRUE minimp=75.000000 maximp=75.000000 favimp=75.000000
Width "Schematic Width Constraint_8" [InNet('NetC111_1')] p156: maxlimit=5.56 minlimit=0 preferedwidth=1.76 toplayer_minwidth=5.56 toplayer_prefwidth=5.56 midlayer1_minwidth=1.76 midlayer1_maxwidth=1.76 midlayer2_minwidth=1.76 midlayer2_maxwidth=1.76 midlayer3_minwidth=1.76 midlayer3_maxwidth=1.76 midlayer4_minwidth=1.76 midlayer4_maxwidth=1.76 bottomlayer_minwidth=5.56 bottomlayer_prefwidth=5.56 impedancedriven=TRUE minimp=75.000000 maximp=75.000000 favimp=75.000000
Width "Schematic Width Constraint_7" [InNet('NetC82_1')] p157: maxlimit=5.56 minlimit=0 preferedwidth=1.76 toplayer_minwidth=5.56 toplayer_prefwidth=5.56 midlayer1_minwidth=1.76 midlayer1_maxwidth=1.76 midlayer2_minwidth=1.76 midlayer2_maxwidth=1.76 midlayer3_minwidth=1.76 midlayer3_maxwidth=1.76 midlayer4_minwidth=1.76 midlayer4_maxwidth=1.76 bottomlayer_minwidth=5.56 bottomlayer_prefwidth=5.56 impedancedriven=TRUE minimp=75.000000 maximp=75.000000 favimp=75.000000
Width "Schematic Width Constraint_6" [InNet('NetJP13_5')] p158: maxlimit=12.34 minlimit=0 preferedwidth=5.07 toplayer_minwidth=2.05 toplayer_prefwidth=12.34 midlayer1_minwidth=0.3 midlayer1_maxwidth=5.07 midlayer2_minwidth=0.3 midlayer2_maxwidth=5.07 midlayer3_minwidth=0.3 midlayer3_maxwidth=5.07 midlayer4_minwidth=0.3 midlayer4_maxwidth=5.07 bottomlayer_minwidth=2.05 bottomlayer_prefwidth=12.34 impedancedriven=TRUE minimp=50.000000 maximp=100.000000 favimp=50.000000
Width "Schematic Width Constraint_5" [InNet('NetL2_1')] p159: maxlimit=5.56 minlimit=0 preferedwidth=1.76 toplayer_minwidth=5.56 toplayer_prefwidth=5.56 midlayer1_minwidth=1.76 midlayer1_maxwidth=1.76 midlayer2_minwidth=1.76 midlayer2_maxwidth=1.76 midlayer3_minwidth=1.76 midlayer3_maxwidth=1.76 midlayer4_minwidth=1.76 midlayer4_maxwidth=1.76 bottomlayer_minwidth=5.56 bottomlayer_prefwidth=5.56 impedancedriven=TRUE minimp=75.000000 maximp=75.000000 favimp=75.000000
Width "Schematic Width Constraint_4" [InNet('NetC82_2')] p160: maxlimit=5.56 minlimit=0 preferedwidth=1.76 toplayer_minwidth=5.56 toplayer_prefwidth=5.56 midlayer1_minwidth=1.76 midlayer1_maxwidth=1.76 midlayer2_minwidth=1.76 midlayer2_maxwidth=1.76 midlayer3_minwidth=1.76 midlayer3_maxwidth=1.76 midlayer4_minwidth=1.76 midlayer4_maxwidth=1.76 bottomlayer_minwidth=5.56 bottomlayer_prefwidth=5.56 impedancedriven=TRUE minimp=75.000000 maximp=75.000000 favimp=75.000000
Width "Schematic Width Constraint_3" [InNet('OUTD2-')] p161: maxlimit=12.34 minlimit=0 preferedwidth=5.07 toplayer_minwidth=12.34 toplayer_prefwidth=12.34 midlayer1_minwidth=5.07 midlayer1_maxwidth=5.07 midlayer2_minwidth=5.07 midlayer2_maxwidth=5.07 midlayer3_minwidth=5.07 midlayer3_maxwidth=5.07 midlayer4_minwidth=5.07 midlayer4_maxwidth=5.07 bottomlayer_minwidth=12.34 bottomlayer_prefwidth=12.34 impedancedriven=TRUE minimp=50.000000 maximp=50.000000 favimp=50.000000
Width "Schematic Width Constraint_2" [InNet('OUTD1-')] p162: maxlimit=12.34 minlimit=0 preferedwidth=5.07 toplayer_minwidth=12.34 toplayer_prefwidth=12.34 midlayer1_minwidth=5.07 midlayer1_maxwidth=5.07 midlayer2_minwidth=5.07 midlayer2_maxwidth=5.07 midlayer3_minwidth=5.07 midlayer3_maxwidth=5.07 midlayer4_minwidth=5.07 midlayer4_maxwidth=5.07 bottomlayer_minwidth=12.34 bottomlayer_prefwidth=12.34 impedancedriven=TRUE minimp=50.000000 maximp=50.000000 favimp=50.000000
Width "Schematic Width Constraint_1" [InNet('NetC72_1')] p163: maxlimit=5.56 minlimit=0 preferedwidth=1.76 toplayer_minwidth=5.56 toplayer_prefwidth=5.56 midlayer1_minwidth=1.76 midlayer1_maxwidth=1.76 midlayer2_minwidth=1.76 midlayer2_maxwidth=1.76 midlayer3_minwidth=1.76 midlayer3_maxwidth=1.76 midlayer4_minwidth=1.76 midlayer4_maxwidth=1.76 bottomlayer_minwidth=5.56 bottomlayer_prefwidth=5.56 impedancedriven=TRUE minimp=75.000000 maximp=75.000000 favimp=75.000000
Width "Schematic Width Constraint" [InNet('NetR131_1')] p164: maxlimit=5.56 minlimit=0 preferedwidth=1.76 toplayer_minwidth=5.56 toplayer_prefwidth=5.56 midlayer1_minwidth=1.76 midlayer1_maxwidth=1.76 midlayer2_minwidth=1.76 midlayer2_maxwidth=1.76 midlayer3_minwidth=1.76 midlayer3_maxwidth=1.76 midlayer4_minwidth=1.76 midlayer4_maxwidth=1.76 bottomlayer_minwidth=5.56 bottomlayer_prefwidth=5.56 impedancedriven=TRUE minimp=75.000000 maximp=75.000000 favimp=75.000000
Width Width_Power [InNetClass('Power')] p165: maxlimit=100 minlimit=5 preferedwidth=20 toplayer_prefwidth=12 bottomlayer_prefwidth=12 minimp=50.000000 maximp=50.000000 favimp=50.000000
Width [All] p166: maxlimit=100 minlimit=5 preferedwidth=5
12 further rules are at their usual default settings.

## Classes and differential pairs
net class REFCLKD: REFCLKD+ REFCLKD-
net class INC2AC: NetC102_2 NetC104_2
net class OUTC2AC: NetC90_2 NetC92_2
net class OUTD2AC: NetC110_2 NetC112_2
net class IND2: IND2+ IND2-
net class IND1: IND1+ IND1-
net class INC2: INC2+ INC2-
net class INC1: INC1+ INC1-
net class INB2: INB2+ INB2-
net class INB1: INB1+ INB1-
net class INA2: INA2+ INA2-
net class INA1: INA1+ INA1-
net class OUTA2: OUTA2+ OUTA2-
net class OUTA1: OUTA1+ OUTA1-
net class OUTB2: OUTB2+ OUTB2-
net class OUTB1: OUTB1+ OUTB1-
net class OUTC2: OUTC2+ OUTC2-
net class OUTC1: OUTC1+ OUTC1-
net class OUTD1: OUTD1+ OUTD1-
net class OUTD2: OUTD2+ OUTD2-
net class Power: +1.5V +1.5VA +3.3V +5V GND
component class "Serial IO Interface1": C69 C72 C73 C74 C78 C82 C85 C86 C96 C97 C98 C101 C114 C115 C117 C120 C126 C127 C128 C129 C130 C131 C132 C133 C134 C135 C136 C137 C199 C200 C201 C202 C203 C204 C205 C206 C207 C208 C209 C210 C266 C267 C268 C269 C270 C271 C272 C273 C274 C275 C276 C277 J6 J7 J9 J11 J13 J14 J17 J18 L1 L2 L3 L4 L5 L6 L7 L8 R59 R62 R63 R67 R68 R70 R71 R74 R76 R79 R80 R81 R82 R83 R87 R88 R89 R90 R92 R95 R96 R97 R98 R101 R108 R109 R110 R111 R113 R114 R115 R116 R118 R119 R121 R125 R130 R133 R134 R136 U16 U17 U18 U19 U20 U21 U22 U23
net class CTL[2..0]: CTL0 CTL1 CTL2
net class FD[15..0]: FD0 FD1 FD2 FD3 FD4 FD5 FD6 FD7 FD8 FD9 FD10 FD11 FD12 FD13 FD14 FD15
net class PRXDA[9..0]: PRXDA0 PRXDA1 PRXDA2 PRXDA3 PRXDA4 PRXDA5 PRXDA6 PRXDA7 PRXDA8 PRXDA9
net class PRXDB[9..0]: PRXDB0 PRXDB1 PRXDB2 PRXDB3 PRXDB4 PRXDB5 PRXDB6 PRXDB7 PRXDB8 PRXDB9
net class PRXDC[9..0]: PRXDC0 PRXDC1 PRXDC2 PRXDC3 PRXDC4 PRXDC5 PRXDC6 PRXDC7 PRXDC8 PRXDC9
net class PRXDD[9..0]: PRXDD0 PRXDD1 PRXDD2 PRXDD3 PRXDD4 PRXDD5 PRXDD6 PRXDD7 PRXDD8 PRXDD9
net class PTXDA[9..0]: PTXDA0 PTXDA1 PTXDA2 PTXDA3 PTXDA4 PTXDA5 PTXDA6 PTXDA7 PTXDA8 PTXDA9
net class PTXDB[9..0]: PTXDB0 PTXDB1 PTXDB2 PTXDB3 PTXDB4 PTXDB5 PTXDB6 PTXDB7 PTXDB8 PTXDB9
net class PTXDC[9..0]: PTXDC0 PTXDC1 PTXDC2 PTXDC3 PTXDC4 PTXDC5 PTXDC6 PTXDC7 PTXDC8 PTXDC9
net class PTXDD[9..0]: PTXDD0 PTXDD1 PTXDD2 PTXDD3 PTXDD4 PTXDD5 PTXDD6 PTXDD7 PTXDD8 PTXDD9
net class RDY[1..0]: RDY0 RDY1
net class RXDA[7..0]: RXDA0 RXDA1 RXDA2 RXDA3 RXDA4 RXDA5 RXDA6 RXDA7
net class RXDB[7..0]: RXDB0 RXDB1 RXDB2 RXDB3 RXDB4 RXDB5 RXDB6 RXDB7
net class RXDC[7..0]: RXDC0 RXDC1 RXDC2 RXDC3 RXDC4 RXDC5 RXDC6 RXDC7
net class RXDD[7..0]: RXDD0 RXDD1 RXDD2 RXDD3 RXDD4 RXDD5 RXDD6 RXDD7
net class RXSTA[2..0]: RXSTA0 RXSTA1 RXSTA2
net class RXSTB[2..0]: RXSTB0 RXSTB1 RXSTB2
net class RXSTC[2..0]: RXSTC0 RXSTC1 RXSTC2
net class RXSTD[2..0]: RXSTD0 RXSTD1 RXSTD2
net class TXCTA[1..0]: TXCTA0 TXCTA1
net class TXCTB[1..0]: TXCTB0 TXCTB1
net class TXCTC[1..0]: TXCTC0 TXCTC1
net class TXCTD[1..0]: TXCTD0 TXCTD1
net class TXDA[7..0]: TXDA0 TXDA1 TXDA2 TXDA3 TXDA4 TXDA5 TXDA6 TXDA7
net class TXDB[7..0]: TXDB0 TXDB1 TXDB2 TXDB3 TXDB4 TXDB5 TXDB6 TXDB7
net class TXDC[7..0]: TXDC0 TXDC1 TXDC2 TXDC3 TXDC4 TXDC5 TXDC6 TXDC7
net class TXDD[7..0]: TXDD0 TXDD1 TXDD2 TXDD3 TXDD4 TXDD5 TXDD6 TXDD7
net class "50 OHM": INA1+ INA1- INA2+ INA2- INB1+ INB1- INB2+ INB2- INC1+ INC1- INC2+ INC2- IND1+ IND1- IND2+ IND2- INSELC INSELD OUTA1+ OUTA1- OUTA2+ OUTA2- OUTB1+ OUTB1- OUTB2+ OUTB2- OUTC1+ OUTC1- OUTC2+ OUTC2- OUTD1+ OUTD1- OUTD2+ OUTD2- REFCLKA+ REFCLKB+ REFCLKB- REFCLKC+ REFCLKC- REFCLKD+
component class CYV15G0403: C1 C2 C3 C4 C5 C6 C7 C8 C159 C160 C161 C162 C163 C164 C165 C166 C167 C211 C212 C213 C214 C215 C216 C217 C218 C219 C220 C221 C222 C223 C224 C225 C226 C227 C228 JP1 JP2 JP3 JP4 JP26 R201 R202 R203 R204 R205 R206 R207 R208 R209 R210 R211 R212 U1
component class FPGA1: C9 C10 C11 C12 C13 C14 C15 C16 C17 C18 C19 C20 C21 C143 C146 C147 C148 C149 C155 C170 C171 C172 C173 C174 C175 C176 C177 C178 C179 C180 C181 C182 C183 C250 D3 D4 D5 D6 D7 D8 D9 D10 D11 D12 D13 D14 D30 JB1 JB2 JP6 R1 R2 R3 R4 R5 R6 R168 R169 R170 R171 R172 R173 R174 R175 R176 R177 R178 R179 R196 R213 R214 U2 U4
component class FPGA2: C22 C23 C24 C25 C26 C27 C28 C29 C30 C31 C32 C33 C34 C150 C151 C152 C153 C156 C157 C184 C185 C186 C187 C188 C189 C190 C191 C192 C193 C194 C195 C196 C197 C251 D15 D16 D17 D18 D19 D20 D21 D22 D23 D24 D25 D26 D31 JB3 JB4 JP8 R7 R8 R9 R10 R11 R12 R180 R181 R182 R183 R184 R185 R186 R187 R188 R189 R190 R191 R197 R215 R216 U3 U5
component class FPGA: JP9 R13 R14 R15 R192
component class "FX2 USB Microcontroller": C35 C36 C37 C38 C39 C40 C41 C42 C168 C169 C252 C253 C254 C255 C256 C257 C258 C259 C260 R16 R17 R18 R195 U6 U7 U8 Y1
component class "Flexible Clock & Configuration": C43 C44 C45 C46 C47 C48 C49 C50 C51 C52 C53 C54 C55 C56 C57 C58 C59 C60 C61 C62 C140 C141 C142 C229 C230 C231 C232 C233 C234 C235 C236 C237 C238 C239 C240 C241 C242 C243 C244 C245 C246 C247 C248 C249 C278 C279 C280 C281 C282 C283 C284 C285 JB5 JP10 JP11 JP12 JP13 R19 R20 R21 R22 R23 R24 R25 R26 R27 R28 R29 R30 R31 R32 R33 R34 R35 R36 R37 R38 R39 R40 R41 R42 R43 R44 R45 R46 R47 R48 R49 R50 R51 R52 R53 R54 R55 R56 R198 R199 R200 R220 R221 R222 R223 R224 R225 R226 R227 R228 R229 R230 R231 R232 R233 R234 R235 U9 U10 U11 U12 U13 U14 X1 X2 X3 X4 X5
component class "Parallel Interfaces": JP14 JP15 JP16 JP17 JP18 JP19 JP20 JP21
component class "Power Supply": C63 C64 C65 C66 C154 C198 C261 C262 C263 C264 C265 D27 D28 J1 L10 Q1 Q2 R193 R194 U15
component class "Serial IO Interface": C67 C68 C70 C71 C75 C76 C77 C79 C80 C81 C83 C84 C87 C88 C89 C90 C91 C92 C93 C94 C95 C99 C100 C102 C103 C104 C105 C106 C107 C108 C109 C110 C111 C112 C113 C116 C118 C119 C121 C122 C123 C124 C125 C138 C139 C144 C145 D1 D2 D32 D33 J2 J3 J4 J5 J8 J10 J12 J15 J16 J19 L9 R57 R58 R60 R61 R64 R65 R66 R69 R72 R73 R75 R77 R78 R84 R85 R86 R91 R93 R94 R99 R100 R102 R103 R104 R105 R106 R107 R112 R117 R120 R122 R123 R124 R126 R127 R128 R129 R131 R132 R135 R137 R138 R139 R140 R141 R142 R143 R144 R145 R146 R147 R148 R149 R150 R151 R152 R153 R154 R155 R156 R157 R158 R159 R160 R161 R162 R163 R164 R165 R166 R217 R218 R219 U24 U25 U26 U27 U28 U29
component class "Top Level": C158 FID1 FID2 FID3 FID4 FID5 FID6 J20 R167 TP1 TP2 TP3 TP4 TP5 TP6 TP7
net class INB2AC: NetC77_1 NetC79_1
net class IND2AC: NetC116_1 NetC119_1
net class REFCLKA: REFCLKA+
net class REFCLKB: REFCLKB+ REFCLKB-
net class REFCLKC: REFCLKC+ REFCLKC-
net class Q0: NetR35_1 NetR35_2
net class Q1: NetR31_1 NetR31_2
net class Q2: NetR34_1 NetR34_2
net class Q3: NetR38_1 NetR38_2
net class OSCILLATOR: NetR43_2 NetR44_2
net class USB: DMINUS DPLUS
net class FCLKA: FCLKA+ FCLKA-
net class FCLKB: FCLKB+ FCLKB-
net class FCLKC: FCLKC+ FCLKC-
net class FCLKD: FCLKD+ FCLKD-

## Components (designator, comment, footprint, x,y, rotation, side; value= is the part's Value field where it differs from the comment)
C1 "0.1u" 0603 1960,3610 r180 top
C2 "0.1u" 0603 2510,3610 r180 top
C3 "0.1u" 0603 2940,3300 r270 top
C4 "0.1u" 0603 2850,2760 r0 top
C5 "0.1u" 0603 1980,2390 r270 top
C6 "0.1u" 0603 2490,2390 r270 top
C7 "0.1u" 0603 1630,2750 r90 top
C8 "0.1u" 0603 1630,3260 r270 top
C9 "0.1u" 0603 5490,3730 r270 top
C10 "0.1u" 0603 5010,4850 r90 bottom
C11 "0.1u" 0603 5280,4850 r90 bottom
C12 "0.1u" 0603 5580,4820 r0 bottom
C13 "0.1u" 0603 5580,4480 r0 bottom
C14 "0.1u" 0603 4680,4450 r180 top
C15 "0.1u" 0603 5580,4980 r0 top
C16 "0.1u" 0603 5300,5170 r90 top
C17 "0.1u" 0603 4680,4830 r180 bottom
C18 "0.1u" 0603 5300,4270 r270 top
C19 "0.1u" 0603 5580,4400 r0 top
C20 "0.1u" 0603 4680,4610 r180 top
C21 "0.1u" 0603 4680,4990 r180 top
C22 "0.1u" 0603 5740,2420 r0 top
C23 "0.1u" 0603 4980,1630 r90 bottom
C24 "0.1u" 0603 5300,1950 r90 bottom
C25 "0.1u" 0603 5580,1660 r0 bottom
C26 "0.1u" 0603 5210,1350 r0 bottom
C27 "0.1u" 0603 4680,1390 r180 bottom
C28 "0.1u" 0603 5580,1740 r0 top
C29 "0.1u" 0603 4680,1710 r180 bottom
C30 "0.1u" 0603 4880,1950 r90 top
C31 "0.1u" 0603 5380,1050 r270 top
C32 "0.1u" 0603 5580,1320 r0 top
C33 "0.1u" 0603 4680,1290 r180 top
C34 "0.1u" 0603 4680,1610 r180 top
C35 "0.1u" 0603 6380,2540 r0 top
C36 "0.1u" 0603 6090,3430 r90 top
C37 "0.1u" 0603 6650,3680 r180 top
C38 "0.1u" 0603 6860,2540 r180 top
C39 "0.1u" 0603 6970,3250 r0 top
C40 "0.1u" 0603 6090,3090 r90 top
C41 "22p" 0603 7310,2790 r180 top
C42 "22p" 0603 7310,2960 r180 top
C43 "0.1u" 0603 3960,2040 r90 top
C44 "0.1u" 0603 3800,2040 r90 top
C45 "0.1u" 0603 4050,2630 r180 top